# Altium PCB Quentin_final_pcb.pcbdoc
Units mil, origin at the board's own origin, x right, y up, seen from the top; angles counter-clockwise.
Board outline 4665.1 x 5659.05 mil, 4 copper layers (Top Layer, GND, PWR, Bottom Layer), stack 23.756 mil thick; 30 components, 45 nets, 123 pads, 11 vias.
Unrouted connection lines stored in the file: 18.
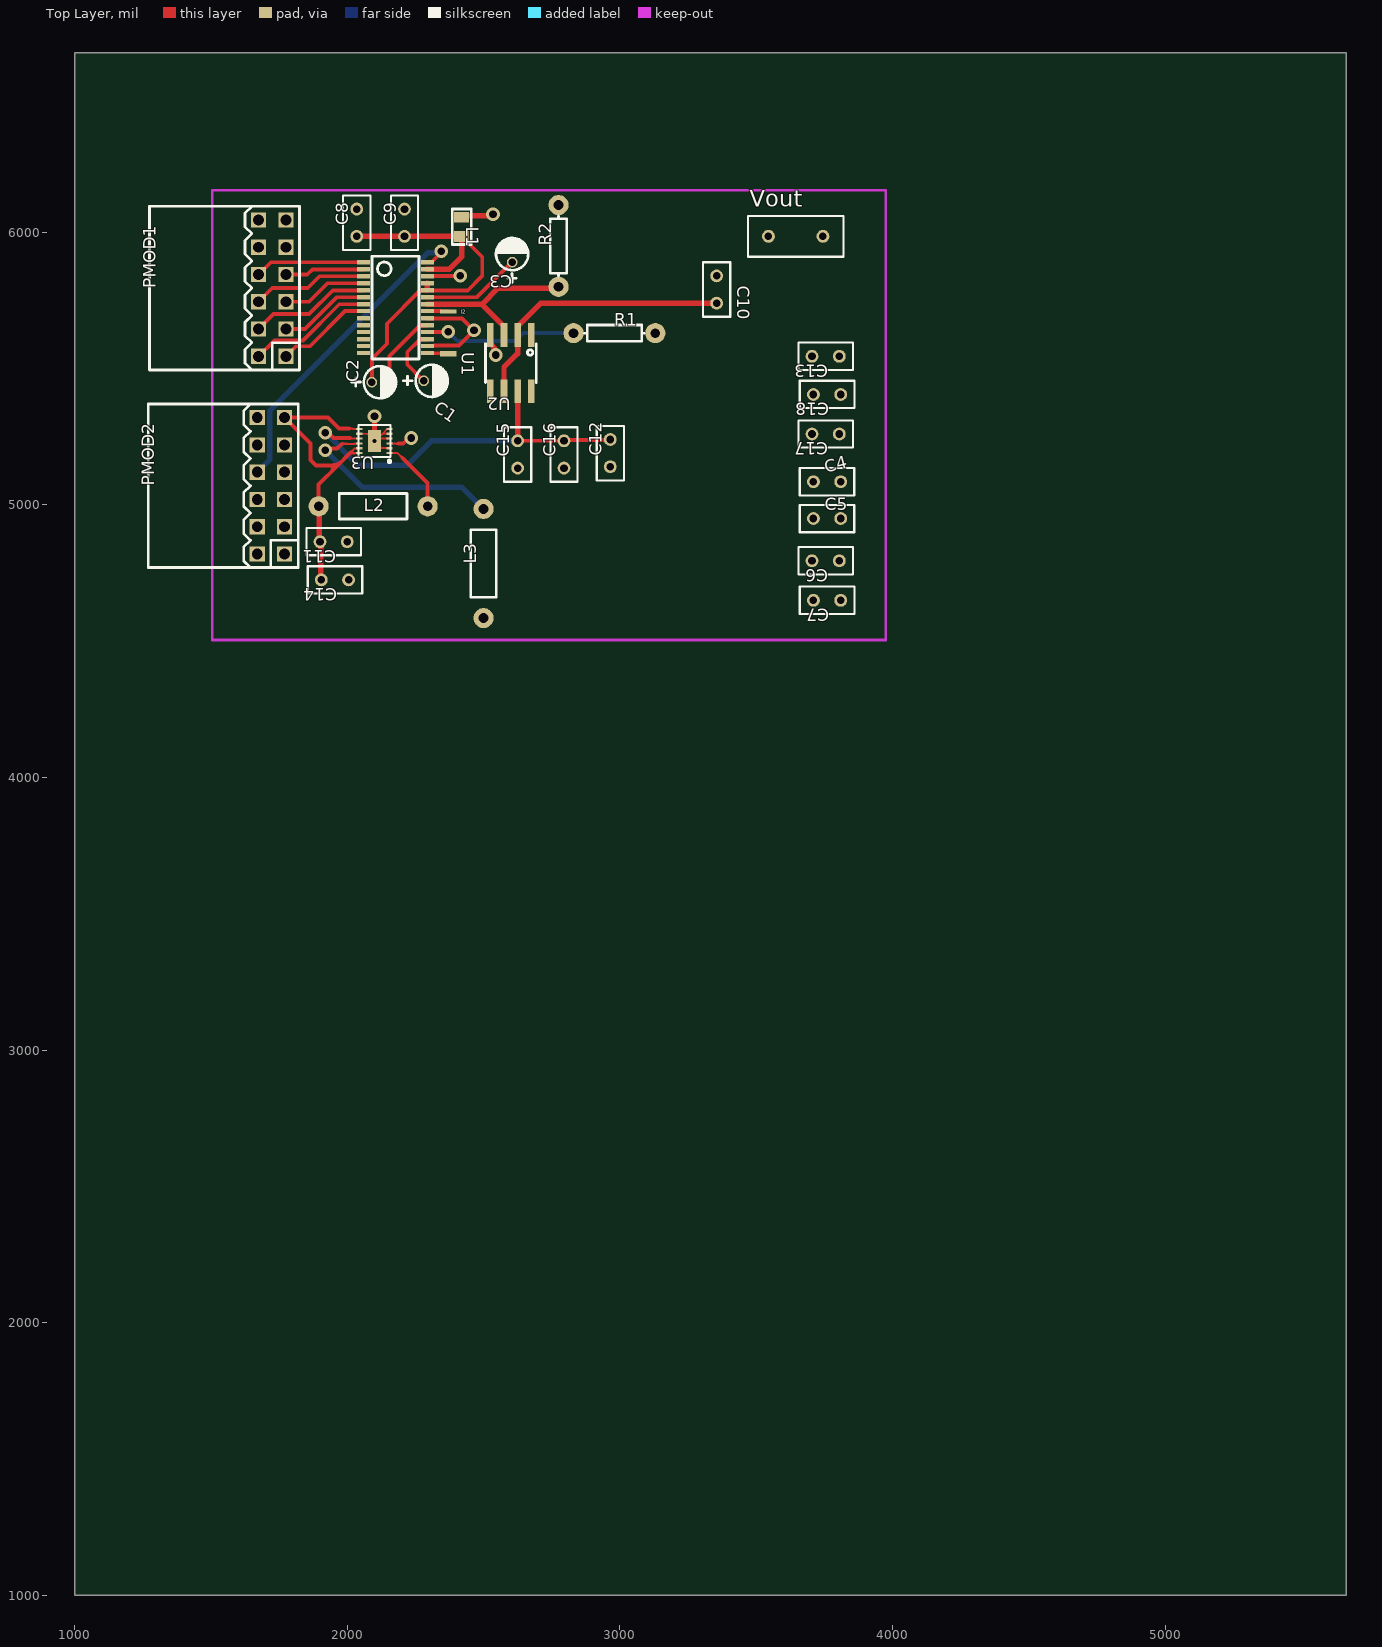
[diagram p0: Top Layer view]
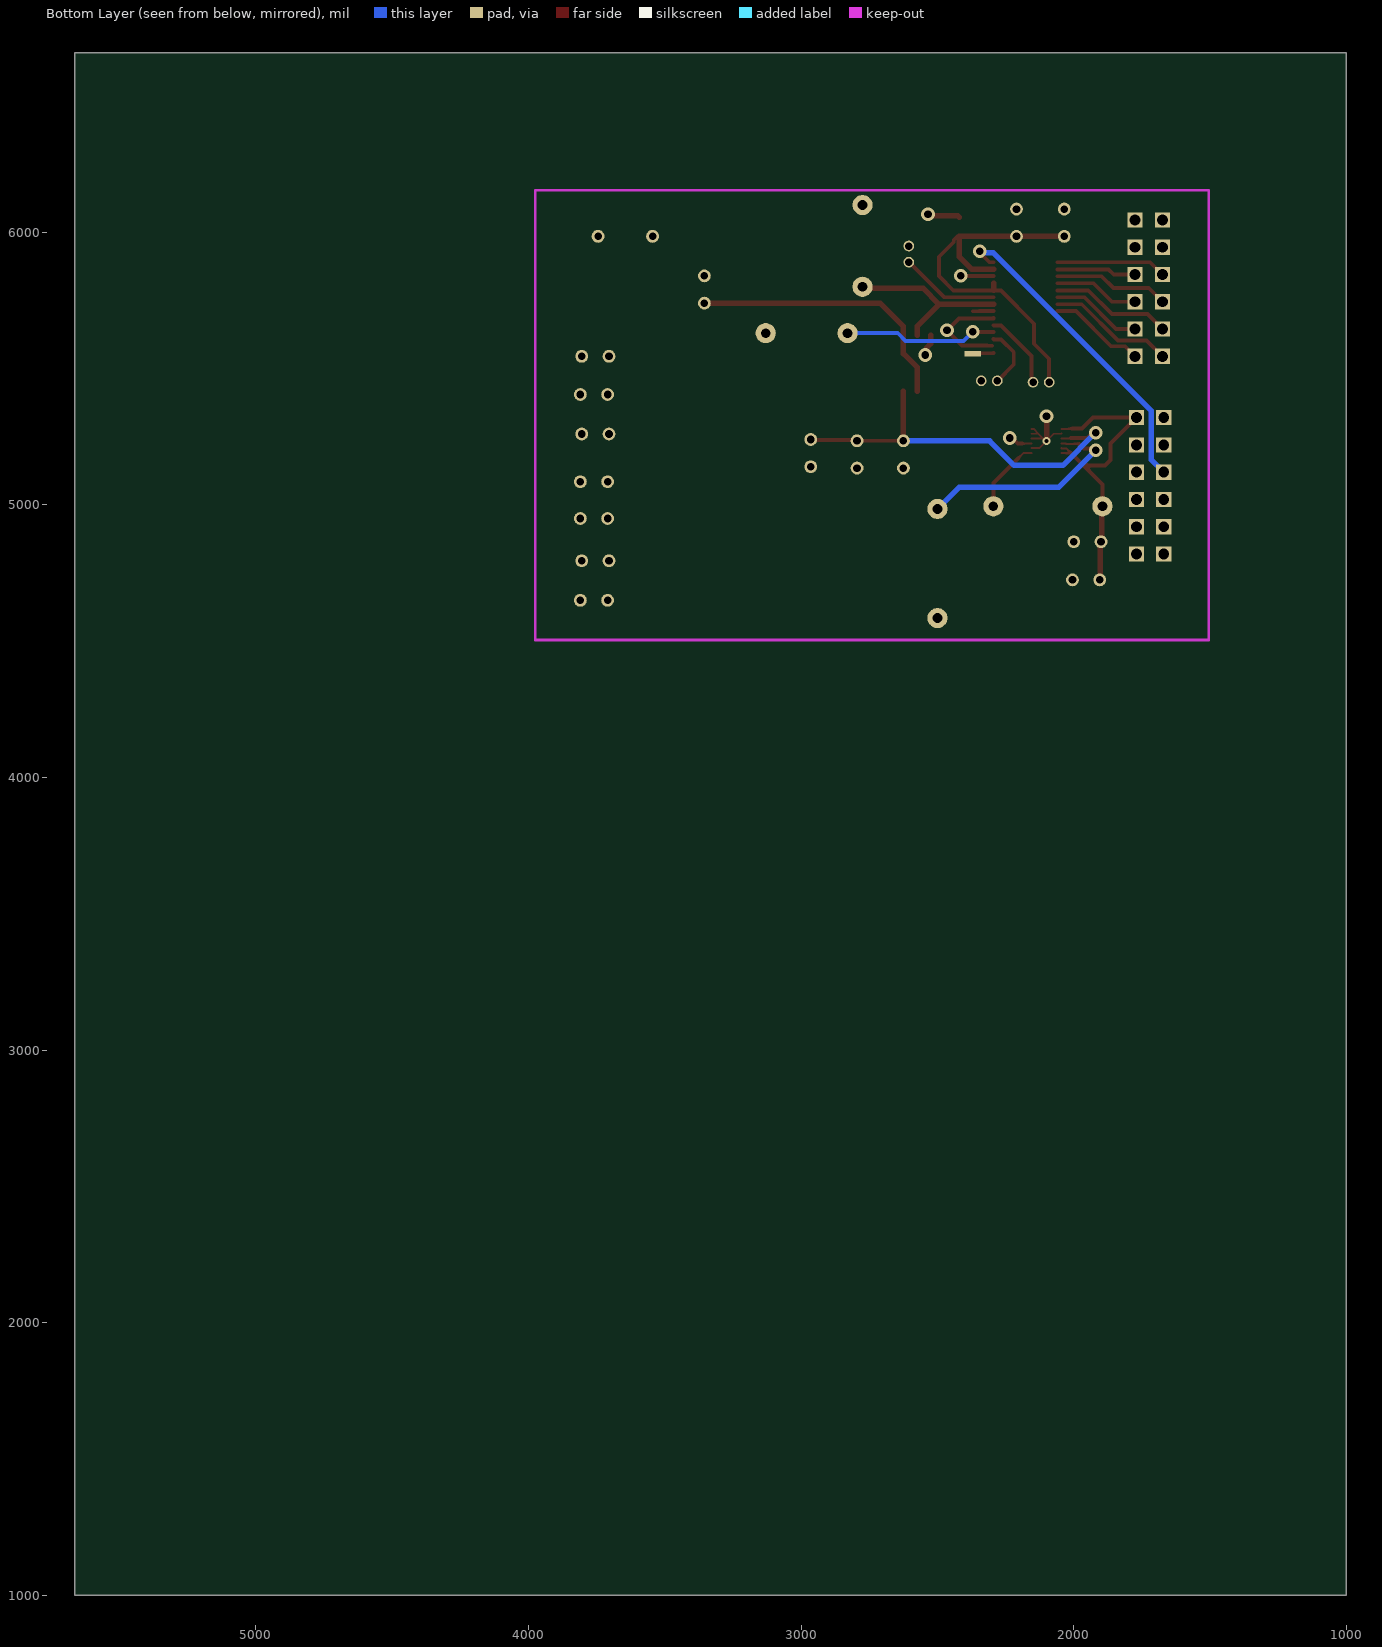
[diagram p1: Bottom Layer view, seen from below]
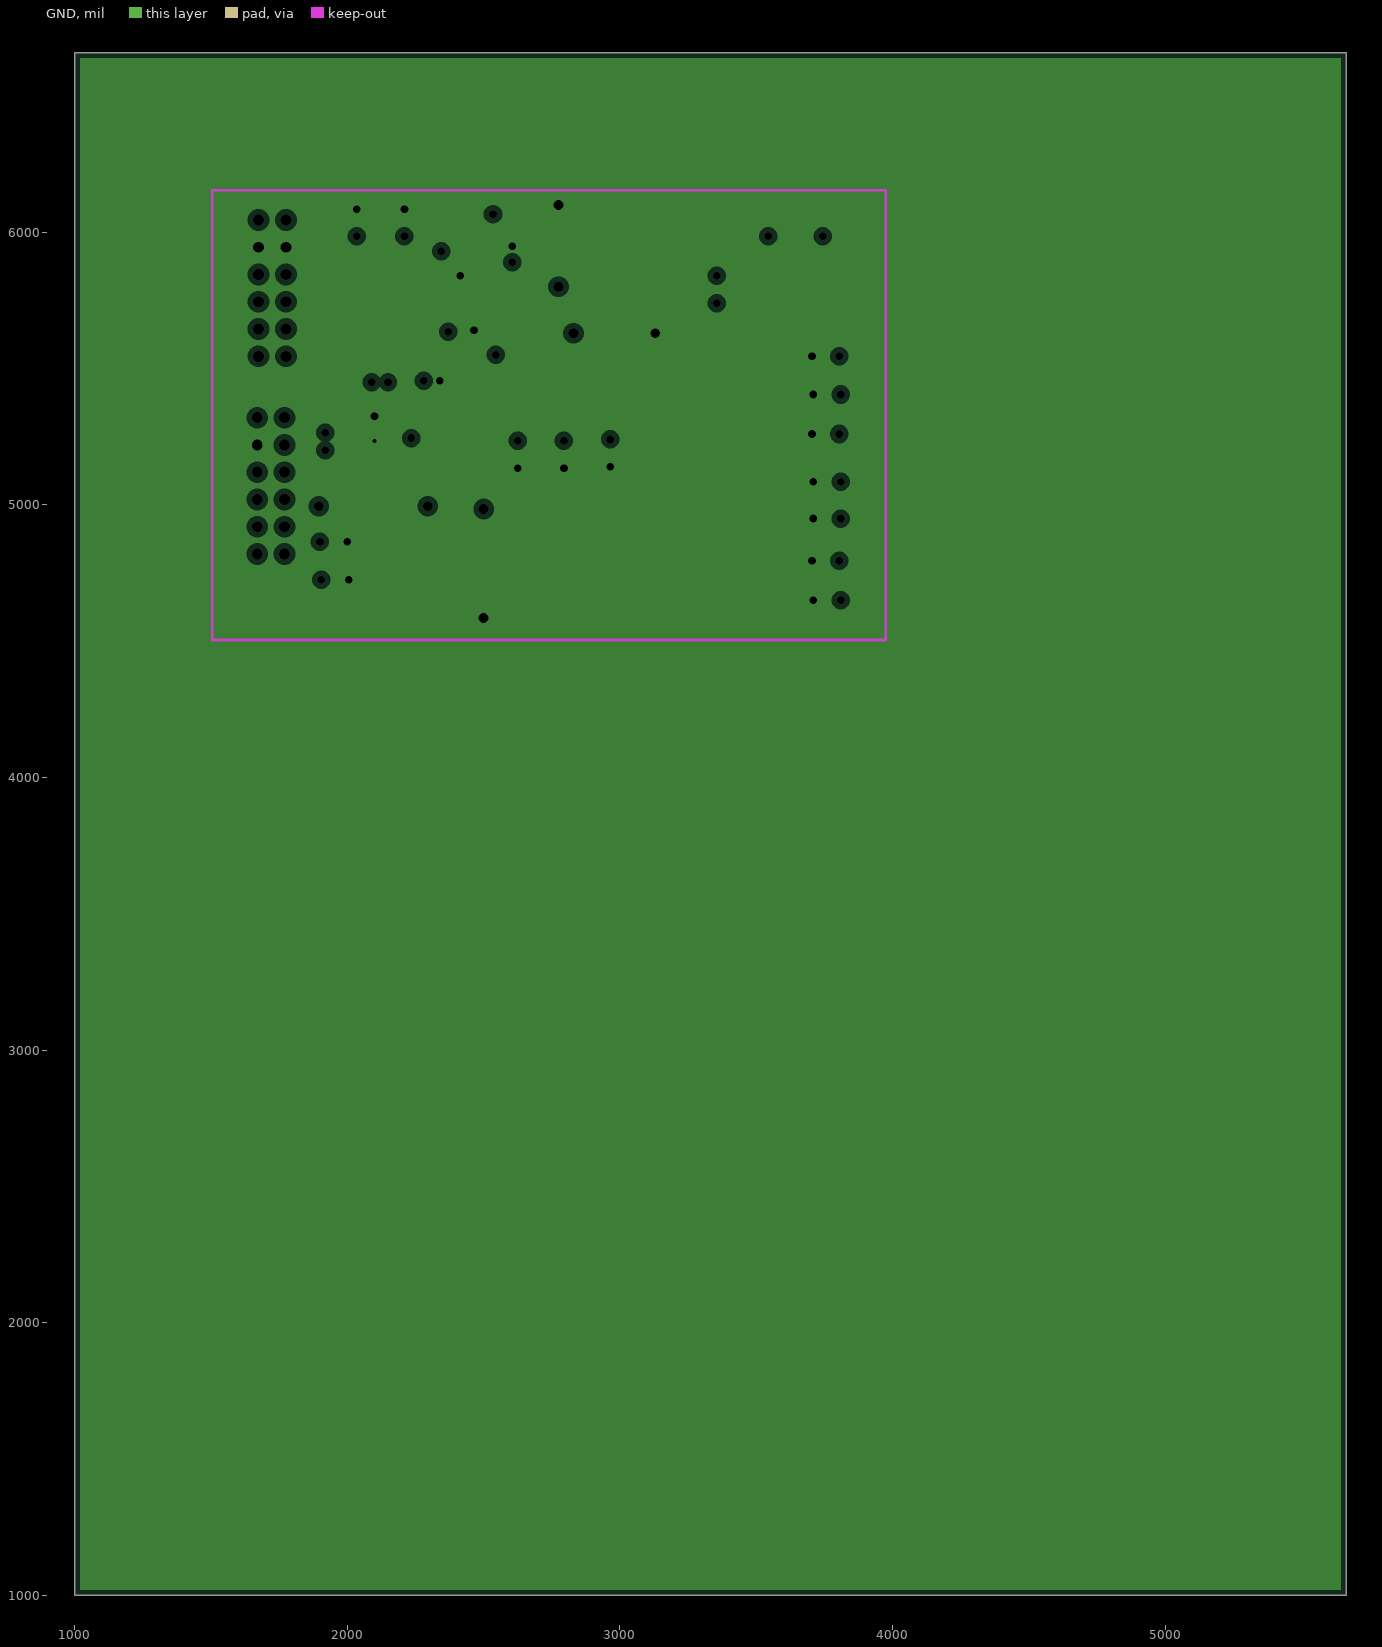
[diagram p2: GND, clearances drawn from the general rule]
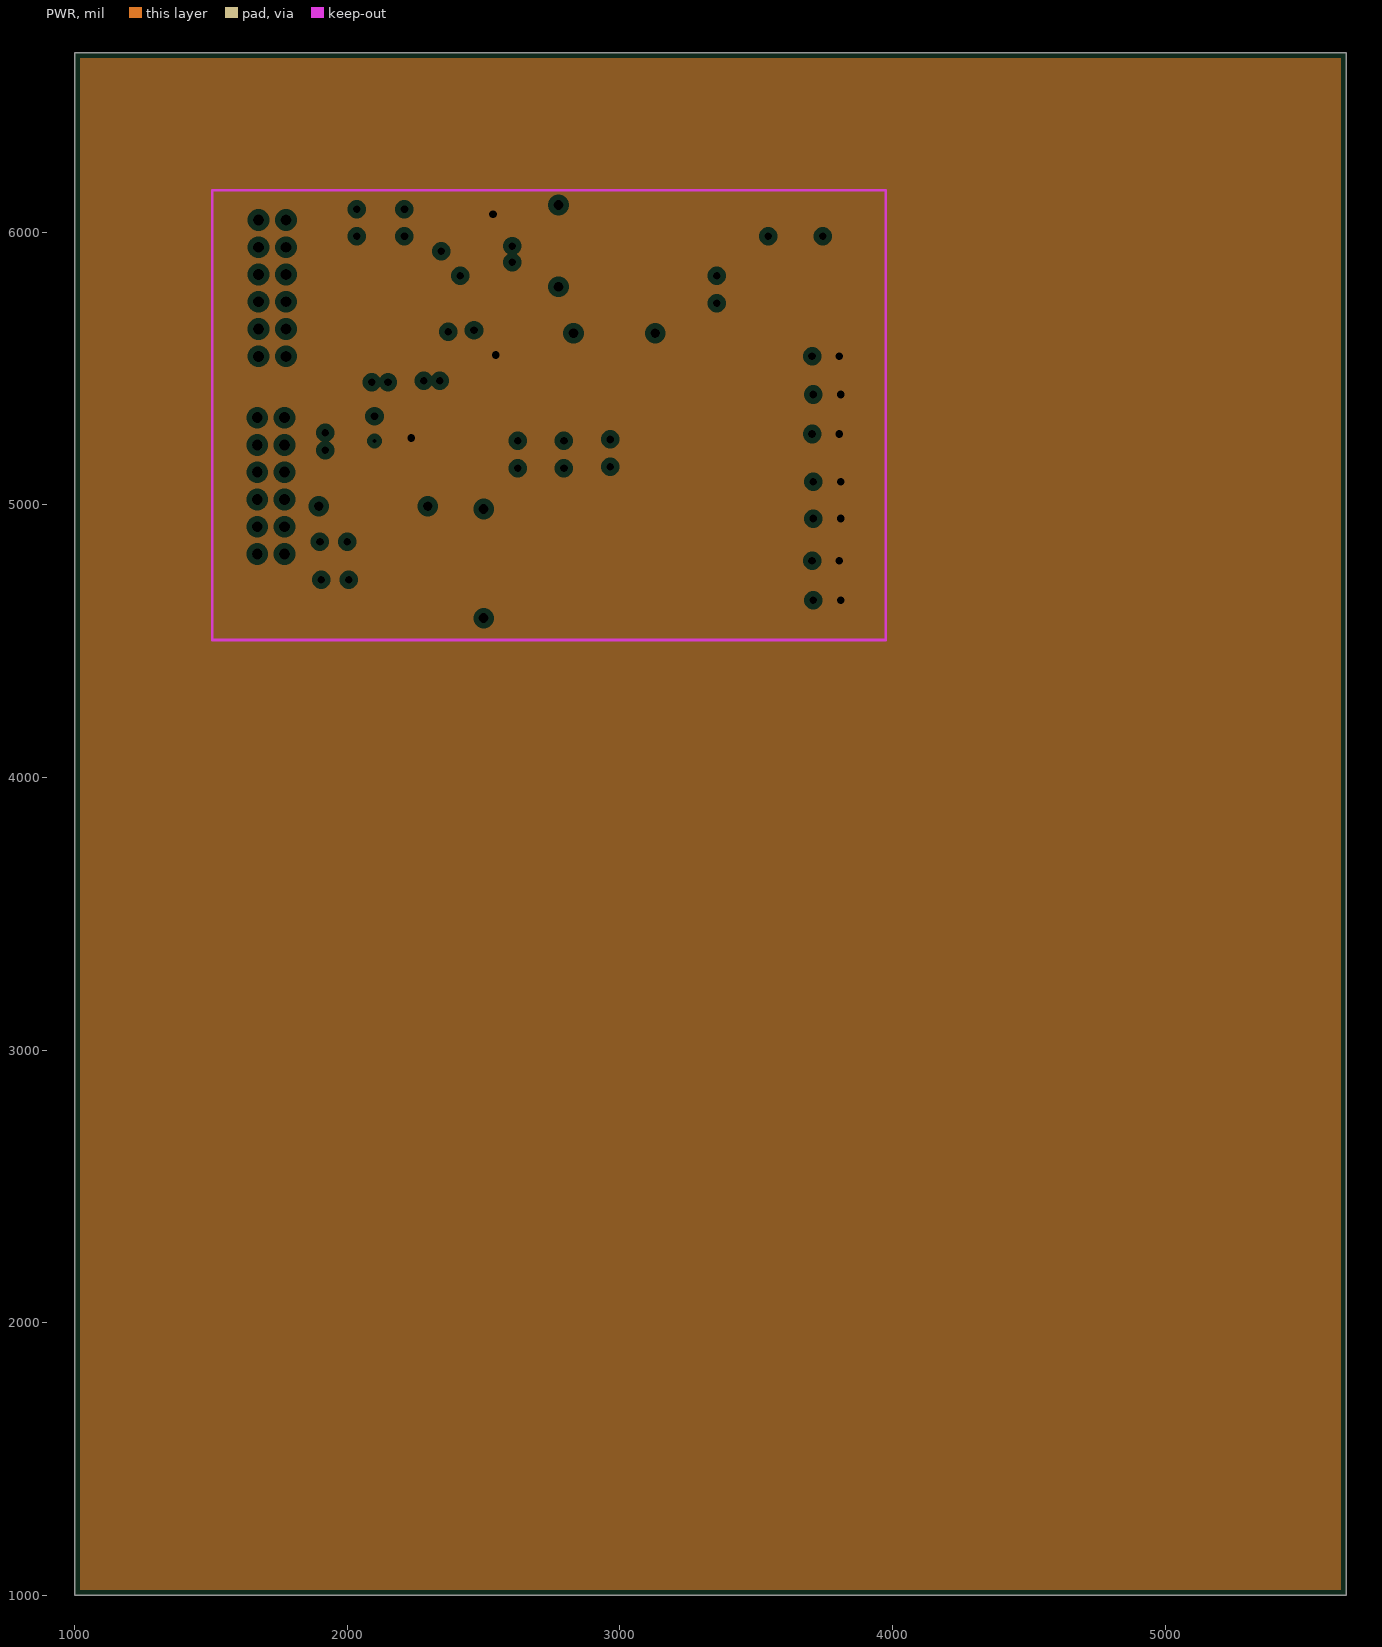
[diagram p3: PWR, clearances drawn from the general rule]

## Layer stack, top to bottom
Top Layer: signal copper 1.4
Dielectric 1: prepreg 2.8, PP-006, Dk 4.1
GND: plane copper 1.378, net GND
Dielectric1: dielectric 12.6, FR-4, Dk 4.8
PWR: plane copper 1.378, net VCC
Dielectric 2: prepreg 2.8, PP-006, Dk 4.1
Bottom Layer: signal copper 1.4

## Board outline
5665.1,1000 1000,1000 1000,6659.05 5665.1,6659.05

## Design rules (kind name [scope] priority, off if disabled: settings)
Clearance [All] p1: gap=7 ignorepadtopadclearanceinfootprint=FALSE except(0: Arc-Hole Track-Hole SMDPad-Hole THPad-Hole Via-Hole Fill-Hole Poly-Hole Region-Hole Text-Hole)
MinimumSolderMaskSliver [All] p1 off: minsoldermaskwidth=10
PlaneClearance [All] p1: clearance=20
PlaneConnect [All] p1: planeconnectstyle=Relief reliefexpansion=20 reliefentries=4 reliefconductorwidth=10 reliefairgap=10
PolygonConnect [All] p1: connectstyle=Relief reliefconductorwidth=10 reliefentries=4 polygonreliefangle="90 Angle" airgapwidth=10
RoutingVias [All] p1: holewidth=28 width=50 viastyle="Through Hole" minholewidth=28 minwidth=50 maxholewidth=28 maxwidth=50
SilkToSilkClearance [All] p1 off: silktosilkclearance=10
SilkToSolderMaskClearance [IsPad] p1 off: minsilkscreentomaskgap=10 clearancetoexposedcopper=TRUE
SolderMaskExpansion [All] p1: expansion=4 istentingtop=FALSE
UnRoutedNet [All] p1: checkbadconnections=TRUE
Width [All] p1: maxlimit=20 minlimit=7 preferedwidth=14 minimp=50.000000 maximp=50.000000 favimp=50.000000
24 further rules are at their usual default settings.

## Components (designator, comment, footprint, x,y, rotation, side; value= is the part's Value field where it differs from the comment)
C1 "1u" CAP-D3.0XF1.5 2310,5455 r90 top
C2 "1u" CAP-D3.0XF1.5 2120,5450 r90 top
C3 "1u" CAP-D3.0XF1.5 2605,5920 r180 top
C4 "1u" RAD-0.1 3760,5085 r0 top
C5 "0.1u" RAD-0.1 3760,4950 r0 top
C6 "47u" RAD-0.1 3755,4795 r180 top
C7 "10u" RAD-0.1 3760,4650 r180 top
C8 "0.1u" RAD-0.1 2035,6035 r90 top
C9 "47u" RAD-0.1 2210,6035 r90 top
C10 "1u" RAD-0.1 3355,5790 r270 top
C11 "10u" RAD-0.1 1950,4865 r180 top
C12 "10u" RAD-0.1 2965,5190 r90 top
C13 "10u" RAD-0.1 3755,5545 r180 top
C14 "100n" RAD-0.1 1955,4725 r180 top
C15 "1u" RAD-0.1 2625,5185 r90 top
C16 "1u" RAD-0.1 2795,5185 r90 top
C17 "1u" RAD-0.1 3755,5260 r180 top
C18 "1u" RAD-0.1 3760,5405 r180 top
I2 "PAD" PAD-60-31-RECT 2370,5710 r0 top (schematic designator VO1)
L1 "330R" L0805 2420,6020 r270 top
L2 "4.7u" AXIAL-0.4 2095,4995 r0 top
L3 "4.7u" AXIAL-0.4 2500,4785 r90 top
PMOD1 "PA_PMOD_GPIO_DIL_HOST" PA_PMOD_DIL_FEMALE 1725,5795 r90 top
PMOD2 "PA_PMOD_GPIO_DIL_HOST" PA_PMOD_DIL_FEMALE 1720,5070 r90 top
R1 "2k" AXIAL-0.3 2980,5630 r0 top
R2 "100" AXIAL-0.3 2775,5950 r90 top
U1 "THS5641AIPW" TSSOP28L 2177,5723.47 r270 top
U2 "THS4001CD" SOIC8 2600,5520 r180 top
U3 "TPS65133" WSON_12P_3X3_045PITCH 2100,5234.53 r180 top
Vout "Comment" RAD-0.2 3645,5985 r0 top

## Footprints (in the part's own frame and the unit in brackets; to place one, negate y for a bottom-side part, rotate by r counter-clockwise, add the part's x,y. Pads: shape width x height; smd on the part's side, far side on the other; paste and mask are expansions set on the pad)
AXIAL-0.3 [mil]
  round 74 hole 35.4: 1(-150,0) 2(150,0)
  silkscreen extent -110,-30 110,30
AXIAL-0.4 [mil]
  round 74 hole 35.4: 1(-200,0) 2(200,0)
  silkscreen extent -124,-47 124,47
CAP-D3.0XF1.5 [mm]
  round 1 hole 0.7: 1(0,0.751) 2(0,-0.751)
  silkscreen extent -1.5,-1.5 1.5,2.65
L0805 [mil]
  rect 40x55 smd: 1(-35,0) 2(35,0)
  silkscreen extent -65,-35 65,35
PA_PMOD_DIL_FEMALE [mil]
  rect 55.7x55.7 hole 40: 1(-250,-50) 2(-150,-50) 3(-50,-50) 4(50,-50) 5(150,-50) 6(250,-50) 7(-250,50) 8(-150,50) 9(-50,50) 10(50,50) 11(150,50) 12(250,50)
  silkscreen extent -300,-100 300,450
PAD-60-31-RECT [mil]
  rect 60x15 smd: P$1(0,0)
RAD-0.1 [mil]
  round 47 hole 28: 1(-50,0) 2(50,0)
  silkscreen extent -100,-50 100,50
RAD-0.2 [mm] "Radial Cap, Thru-Hole; 2 Leads; 0.2 in Pin Spacing"
  round 1.2 hole 0.7: 1(-2.54,0) 2(2.54,0)
  silkscreen extent -4.44,-1.91 4.44,1.91
SOIC8 [mil]
  rect 24x87 smd: 1(-75,-103) 2(-25,-103) 3(25,-103) 4(75,-103) 5(75,103) 6(25,103) 7(-25,103) 8(-75,103)
  silkscreen extent -93,-71 93,71
TSSOP28L [mil]
  rect 15.7x47.2 smd: 1(-166.53,-117) 4(-89.48,-117) 7(-12.48,-117) 8(12.52,-117) 9(38.47,-117) 12(115.52,-117) 13(140.57,-117) 14(166.52,-117) 16(140.52,117) 17(115.52,117) 20(38.47,117) 21(12.52,117) 22(-12.48,117) 25(-89.48,117) 28(-166.53,117)
  rect 15.75x47.2 smd: 2(-140.45,-117) 3(-115.45,-117) 10(64.55,-117) 11(89.55,-117) 18(89.55,117) 19(64.55,117) 26(-115.45,117) 27(-140.45,117)
  rect 15.6x47.2 smd: 5(-63.48,-117) 6(-38.48,-117) 15(166.52,117) 23(-38.48,117) 24(-63.48,117)
  silkscreen extent -188,-86 189,86
WSON_12P_3X3_045PITCH [mm]
  rect 0.6x0.2 smd: 1(-1.4,1.125) 2(-1.4,0.675) 3(-1.4,0.225) 4(-1.4,-0.225) 5(-1.4,-0.675) 6(-1.4,-1.125) 7(1.4,-1.125) 8(1.4,-0.675) 9(1.4,-0.225) 10(1.4,0.225) 11(1.4,0.675) 12(1.4,1.125)
  rect 1.21x2.02 smd: 13(0,0)
  silkscreen extent -1.52,-1.5 1.5,2.03

## Free pads (board coordinates)
  rect 60x20 all layers, no hole: 3(2370,5555)

## Via types
v1: diameter 50, hole 28, Top Layer to Bottom Layer, 10 vias
v2: diameter 30, hole 15, Top Layer to Bottom Layer, 1 vias

## Nets (pads, with @x,y where several pads share a name; then routed paths per layer and width w, separated by ;. In a path a pad name is that pad's centre, name@x,y a point inside that pad or via, vN(x,y) a via of type N, cw(c..) or ccw(c..) an arc to the next point about the centre after c; other vN are vias at no path point)
C10_1: C10.1 | length 3.5
  Top Layer w20: C10.1 C10.1@3357.5,5837.5
GND: C1.2 C3.2 C4.1 C5.1 C6.2 C7.2 C8.2 C9.2 C11.1 C12.1 C13.2 C14.1 C15.1 C16.1 C17.2 C18.2 L3.1 PMOD1.5 PMOD1.11 PMOD2.11 R1.2 R2.2 U1.16 U1.20 U1.26 U3.2 U3.4 U3.5 U3.6 U3.8 U3.13 | length 866.4
  Top Layer w7: U3.8@2045.32,5261.54 U3.8 2073.43,5261.1 v2(2100,5234.53) ; U3.2 2126.58,5207.95 v2(2100,5234.53) ; U3.5 2129.53,5261.1 ; U3.6 2147.24,5278.82 2129.53,5261.1 ; U3.4@2155.55,5243.82 U3.4 U3.13@2111.81,5243.39 ; v2(2100,5234.53) 2108.86,5243.39 U3.13@2111.81,5243.39 ; U3.13@2111.81,5243.39 2129.53,5261.1
  Top Layer w14: U1.20 2294.85,5684.15 2420.85,5684.15 v1(2465,5640) 2410,5585 2317.6,5585 2316.4,5583.8 U1.16@2299.58,5583.8 ; U1.26 2294.54,5839.46 2414.46,5839.46 v1(2415,5840)
  Top Layer w20: v2(2100,5234.53) 2100,5325.12 v1(2100.12,5325.24)
PMOD1_6: C11.2 C14.2 L2.1 PMOD2.6 U3.7 U3.11 U3.12 | length 1188.8
  Top Layer w7: 2005,5280 2020,5280 2021.18,5278.82 U3.7 ; U3.12 2044.53,5189.88 2009.88,5189.88 2027.52,5207.52 2044.44,5207.52 U3.11
  Top Layer w14: L2.1 1895,5075 1965,5145 ; 2005,5280 1970,5280 1930,5320 PMOD2.6 1865,5225 1865,5165 1885,5145 1965,5145 ; 2009.88,5189.88 1965,5145
  Top Layer w20: L2.1 1897.5,4992.5 1897.5,4867.5 C11.2 1902.5,4862.5 1902.5,4727.5 C14.2
PMOD1_12: PMOD1.12
PMOD2_1: PMOD2.1
PMOD2_2: PMOD2.2
PMOD2_3: PMOD2.3
PMOD2_4: PMOD2.4
PMOD2_5: PMOD2.5
PMOD2_6: 
PMOD2_7: PMOD2.7
PMOD2_8: PMOD2.8
PMOD2_9: PMOD2.9
PMOD2_12: PMOD2.12
U1_1: PMOD1.10 U1.1 | length 403.6
  Top Layer w14: PMOD1.10 1720,5890 U1.1
U1_2: PMOD1.4 U1.2 | length 292.8
  Top Layer w14: PMOD1.4 1853.23,5845 1872.14,5863.91 U1.2
U1_3: PMOD1.9 U1.3 | length 423.9
  Top Layer w14: PMOD1.9 1725,5795 1855,5795 1898.92,5838.92 U1.3
U1_4: PMOD1.3 U1.4 | length 313.1
  Top Layer w14: PMOD1.3 1860,5745 1927.95,5812.95 U1.4
U1_5: PMOD1.8 U1.5 | length 443.8
  Top Layer w14: PMOD1.8 1730,5700 1860,5700 1946.95,5786.95 U1.5
U1_6: PMOD1.2 U1.6 | length 333.4
  Top Layer w14: PMOD1.2 1845,5645 1961.95,5761.95 U1.6
U1_7: PMOD1.7 U1.7 | length 464.1
  Top Layer w14: PMOD1.7 1733.15,5603.15 1838.15,5603.15 1970.95,5735.95 U1.7
U1_8: PMOD1.1 U1.8 | length 353.7
  Top Layer w14: PMOD1.1 1812.15,5582.15 1863.38,5582.15 1992.18,5710.95 U1.8
U1_9: U1.9
U1_10: U1.10
U1_11: U1.11
U1_12: U1.12
U1_13: U1.13
U1_14: U1.14
U1_15: pad.3 U1.15 | length 76.8
  Top Layer w14: U1.15 2294.8,5556.15 2368.85,5556.15 pad.3
U1_17: C1.1 U1.17 | length 224.3
  Top Layer w14: C1.1 2280,5455 2220,5515 2220,5560.2 2266.9,5607.1 2293.15,5607.1 U1.17
U1_18: R1.1 U1.18 | length 562.5
  Top Layer w14: U1.18 2294.54,5634.46 2369.46,5634.46 v1(2370,5635)
  Bottom Layer w14: v1(2370,5635) 2404,5601 2616.8,5601 2645.8,5630 R1.1
U1_19: C2.2 U1.19 | length 284.1
  Top Layer w14: C2.2 2154.4,5454.85 2154.4,5470.06 2155.23,5470.89 2155.23,5546.41 2266.86,5658.05 2293.12,5658.05 U1.19
U1_21: I2.P$1 U1.21 | length 76.4
  Top Layer w14: U1.21 2346.55,5710.95 2347.5,5710 I2.P$1
U1_22: R2.1 U1.22 U2.3 | length 654.2
  Top Layer w20: U1.22 2493.55,5735.95 ; U2.3 2575,5654.5 2493.55,5735.95 ; R2.1 2770,5795 2552.6,5795 2493.55,5735.95
U1_23: C3.1 U1.23 | length 364.2
  Top Layer w14: U1.23 2476.5,5761.95 C3.1
U1_24: C2.1 C8.1 C9.1 L1.2 U1.24 U1.25 U1.27 | length 1471.1
  Top Layer w14: C2.1 2090.45,5536.15 2145.45,5591.15 2145.45,5664.6 2267,5786.15 2293.2,5786.15 U1.24 2441.95,5786.95 2495,5840 2495,5910 2440.5,5964.5 2440.5,5972 2427.5,5985 L1.2
  Top Layer w20: C8.1 C9.1 L1.2 2420,5910 2373.92,5863.92 U1.27 ; U1.24 U1.25
U1_28: PMOD2.10 U1.28 | length 1186.2
  Top Layer w14: U1.28 2309.75,5890 2345,5925.25 v1(2345,5930)
  Bottom Layer w20: PMOD2.10 1716.13,5166.13 1716.13,5345.88 2294.52,5924.26 2339.26,5924.26 v1(2345,5930)
U2_1: U2.1
U2_2: C10.2 U2.2 U2.6 | length 1023.6
  Top Layer w20: U2.6 2575,5505 2625,5555 U2.2 2625,5654.5 2710.5,5740 C10.2
U2_5: U2.5
U2_7: C12.2 C15.2 C16.2 U2.7 U3.9 | length 1450.3
  Top Layer w7: 2010,5245 2011.61,5243.39 2044.01,5243.39 2044.44,5243.82 U3.9
  Top Layer w14: v1(1920,5265) 1929.74,5265 1949.74,5245 2010,5245 ; C15.2 C16.2 2797.5,5237.5 2962.5,5237.5 C12.2
  Top Layer w20: C15.2 U2.7
  Bottom Layer w20: v1(1920,5265) 2040,5145 2218.8,5145 2308.8,5235 C15.2
U2_8: U2.8
U3_1: L2.2 U3.1 | length 279.2
  Top Layer w7: U3.1@2163.58,5189.8 2155.55,5189.8 U3.1 2163.58,5190.24 2184.76,5190.24 2205,5170
  Top Layer w14: 2205,5170 2295,5080 L2.2
U3_10: L3.2 U3.10 | length 806.6
  Top Layer w7: 1980,5224 2029,5224 2030.23,5225.23 2044.44,5225.23 U3.10
  Top Layer w14: v1(1920,5200) 1926.89,5206.89 1962.89,5206.89 1980,5224
  Top Layer w20: L3.2@2498.53,4986.47 L3.2
  Bottom Layer w20: v1(1920,5200) 2055,5065 2420,5065 L3.2
VCC: C4.2 C5.2 C6.1 C7.1 C13.1 C17.1 C18.1 L1.1 U2.4 U3.3 | length 289.4
  Top Layer w7: U3.3 2155.55,5225.24 2190.12,5225.24
  Top Layer w14: 2190.12,5225.24 2205.38,5225.24 2225.38,5245.24 v1(2235.12,5245.24)
  Top Layer w20: L1.1 2426,6061 2529.04,6061 v1(2534.78,6066.74) ; U2.4 2525,5591.5 2539.26,5577.24 2539.26,5555.74 v1(2545,5550)
pads on no net: PMOD1.6 Vout.1 Vout.2

## Polygon pours and split planes (outlines as drawn)
GND on GND (split plane): 5645,1020.1 1020.1,1020.1 1020.1,6638.95 5645,6638.95
VCC on PWR (split plane): 5645,1020.1 1020.1,1020.1 1020.1,6638.95 5645,6638.95

## Keep-outs
Keep-Out Layer:
  lines w10: 1505,4504.05 3975,4504.05 3975,6154.05 1505,6154.05 1505,4504.05